# Allegro board wireless_receiver.brd
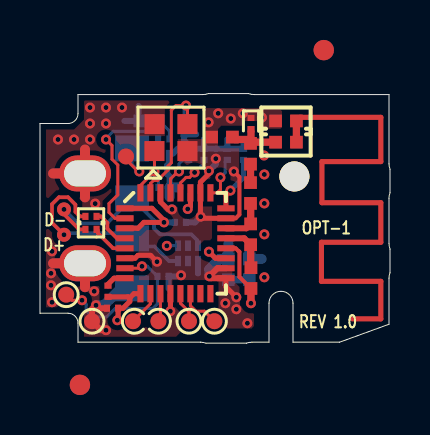
[diagram p0: board, top side]
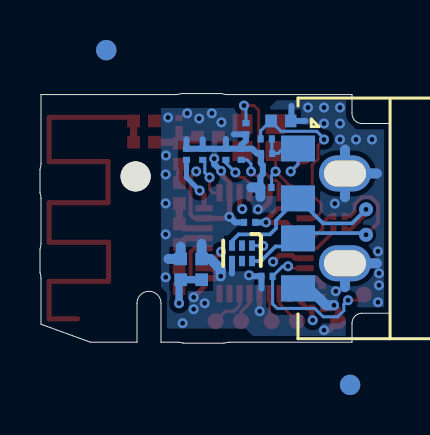
[diagram p1: board, bottom side, seen from below]

Outline 17.5 x 12.5 mm; copper layers: TOP, LAYER_2, LAYER_3, BOTTOM. Coordinates in mm from the lower left corner of the outline.
Outline path: 0,11 0,1.5 1.4,1.5 arc(1.75,1.35) 1.9,1 1.9,0.05 8.02,0.05 arc(8.16,0.04) 8.3,0 10.32,0 arc(10.46,0.04) 10.6,0.05 11.45,0.05 11.45,2 arc(12.05,2.6) 12.65,2 12.65,0.05 14.98,0.05 17.45,0.95 17.45,3.25 arc(17.46,3.39) 17.5,3.53 17.5,4.71 arc(17.46,4.85) 17.45,4.99 17.45,7.25 arc(17.46,7.39) 17.5,7.53 17.5,8.71 arc(17.46,8.85) 17.45,8.99 17.45,12.45 10.71,12.45 arc(10.57,12.46) 10.43,12.5 8.42,12.5 arc(8.28,12.46) 8.14,12.45 1.9,12.45 1.9,11.5 arc(1.75,11.15) 1.4,11 0,11

## Design rules (mm)
net group DIFFPAIR0: nets N226786 N226790
net group USB: nets N235738 N235745

## Placement (name value [footprint] x y rotation side)
C1  15pF  [0201]  7.2 10.74 90 bottom
C2  15pF  [0201]  6.2 7.8 180 bottom
C3  2.2nF  [0402]  9.42 3.7 90 bottom
C4  4.7pF  [0402]  10.47 3.7 90 bottom
C5  1.0pF  [0402]  10.53 9.49 90 top
C6  1.0pF  [0402]  9.1 10.32 180 top
C7  10nF  [0201]  3.63 1.75 180 top
C8  10nF  [0201]  7.02 6.05 0 bottom
C9  33nF  [0201]  7.44 9.46 90 bottom
C10  33nF  [0201]  8.2 9.46 90 bottom
C11  0.1uF  [0201]  10.18 9.46 90 bottom
C12  10uF  [0402#2]  5.45 11.13 180 bottom
C14  0.1uF  [0201]  6.17 9.5 0 bottom
C15  1.0pF  [0201]  10.55 11 90 top
C16  1.5pF  [0402]  12.3 10.07 0 top
J1  USB A  [CON-629004113921]  4.6 6.25 90 bottom
L1  5.6nH  [0402]  10.53 5.45 270 top
L2  6.8nH  [0402]  10.55 3.26 270 top
L3  6.8nH  [0402]  10.53 7.52 90 top
L4  3.9nH  [0402]  12.3 11.13 180 top
NOREF  -  [unnamed]  14.19 14.68 0 top
NOREF#2  -  [#2]  -96.66 11.13 0 top
NOREF#3  -  [#2]  -131.29 97.11 0 top
NOREF#4  -  [#2]  -79.87 74.31 0 top
NOREF#5  -  [unnamed#2]  12.72 8.35 0 top
NOREF#6  -  [unnamed]  2 -2.09 0 top
NOREF#7  -  [unnamed]  14.19 14.68 180 bottom
NOREF#8  -  [unnamed]  2 -2.09 180 bottom
R2  22K  [0201]  9.36 9.46 90 bottom
R5  10K  [0201]  3.4 2.6 270 top
R7  10K  [0201]  6.15 3.35 0 bottom
R8  10  [0201]  6.19 10.23 0 bottom
R9  22  [0201]  2.55 6.35 0 top
R10  22  [0201]  2.55 5.7 0 top
TP1  TP  [TP-1_0MM]  1.31 2.43 0 top
TP2  TP  [TP-1_0MM]  4.65 1.1 0 top
TP3  TP  [TP-1_0MM]  5.92 1.1 0 top
TP4  TP  [TP-1_0MM]  7.45 1.1 0 top
TP5  TP  [TP-1_0MM]  8.72 1.1 0 top
TP6  TP  [TP-1_0MM]  2.6 1.1 0 top
TP7  TP  [TP-1_0MM]  4.3 9.35 0 top
U1  nRF24LU1+  [QFN32]  6.77 5 270 top
U3  TPD2E001DRY  [SON6-TPD2E001DRY]  7.4 4.5 270 bottom
X1  16MHz  [XTAL-425F35B016M0000]  6.55 10.3 0 top

## Library data of the parts
C1-C12 C14-C16 = CAP NP
J1 = CON USB 4P 629004113921_2: Tolerance: TOL; User Part Number: PART#
L1-L4 = IND
R2 R5 R7-R10 = RES
TP1-TP7 = TP: User Part Number: *
U1 = IC NRF24LU1P: User Part Number: *
U3 = DIODE TVS TPD2E001DRY: User Part Number: *
X1 = xtal 425F35B016M0000: Tolerance: TOL; User Part Number: PART#

## Footprints (pads in the part's own frame, mm; a bottom-side part is the same pattern mirrored in y, then rotated)
0201
  rect 0.305x0.356 smd: 1(-0.279,0) 2(0.279,0)
0402
  rect 0.635x0.635 smd: 1(-0.521,0) 2(0.521,0)
0402#2
  rect 0.582x0.635 smd: 1(-0.521,0)
  rect 0.569x0.635 smd: 2(0.521,0)
CON-629004113921
  rect 1.3x1.7 smd: 1(3.5,0) 2(1.001,0) 3(-1.001,0) 4(-3.5,0)
  oval 1.8x2.6 hole 1.3x2.1: 5(-2.25,-2.35) 6(2.25,-2.35)
QFN32
  rect 0.305x0.864 smd: 1(-1.75,-2.525) 2(-1.25,-2.525) 3(-0.75,-2.525) 4(-0.25,-2.525) 5(0.25,-2.525) 6(0.75,-2.525) 7(1.25,-2.525) 8(1.75,-2.525) 17(1.75,2.525) 18(1.25,2.525) 19(0.75,2.525) 20(0.25,2.525) 21(-0.25,2.525) 22(-0.75,2.525) 23(-1.25,2.525) 24(-1.75,2.525)
  rect 0.864x0.305 smd: 9(2.525,-1.75) 10(2.525,-1.25) 11(2.525,-0.75) 12(2.525,-0.25) 13(2.525,0.25) 14(2.525,0.75) 15(2.525,1.25) 16(2.525,1.75) 25(-2.525,1.75) 26(-2.525,1.25) 27(-2.525,0.75) 28(-2.525,0.25) 29(-2.525,-0.25) 30(-2.525,-0.75) 31(-2.525,-1.25) 32(-2.525,-1.75)
SON6-TPD2E001DRY
  rect 0.52x0.3 smd: 1(-0.385,0.5) 2(-0.385,0) 3(-0.385,-0.5) 4(0.385,-0.5) 5(0.385,0) 6(0.385,0.5)
TP-1_0MM
  round 0.8 smd: 1(0,0)
unnamed
  round 1.02 smd: (0,0)
unnamed#2
  round 1.5 hole 1.5 unplated: (0,0)
XTAL-425F35B016M0000
  rect 1x1 smd: 1(-0.825,-0.675) 2(0.825,-0.675) 3(0.825,0.675) 4(-0.825,0.675)

## Nets
GND: C1.1 C2.1 C3.2 C4.2 C6.2 C7.2 C8.2 C9.2 C10.2 C11.2 C12.2 C14.2 C15.2 J1.4(GND) J1.5 J1.6 L4.2 R2.2 R7.2 TP6.1 U1.6(VSS#6) U1.12(VSS#12) U1.17(VSS#17) U1.18(VSS#18) U1.23(VSS#23) U1.26(VSS#26) U1.30(VSS#30) U3.4(GND) X1.2(GND1) X1.4(GND2)
VDD: C7.1 C8.1 C11.1 R5.2 U1.1(VDD#1) U1.3(VDD#3) U1.9(VDD#9) U1.19(VDD#19) U1.24(VDD#24) U1.27(VDD#27)
N223495: C16.2 L4.1
N225227: C5.2 C6.1 C15.1 C16.1
N225243: C5.1 L3.2
N225247: L1.1 L3.1 U1.22(ANT2)
N225251: L1.2 L2.1 U1.21(ANT1)
N225338: C3.1 C4.1 L2.2 U1.20(VDD_PA)
N226077: C10.1 U1.28(DEC1)
N226084: C9.1 U1.29(DEC2)
N226173: C1.2 U1.31(XC2) X1.3
N226183: C2.2 U1.32(XC1) X1.1(I)
N226786: R9.2 U1.4(D+)
N226790: R10.2 U1.5(D-)
N226831: C12.1 R8.2 U1.2(VBUS)
N226878: C14.1 J1.1(VBUS) R8.1 TP7.1 U3.1(VCC)
N227023: R5.1 U1.8(R\E\S\E\T\)
N227128: R7.1 TP1.1 U1.7(PROG)
N227143: TP2.1 U1.10(P0.0)
N227532: TP3.1 U1.11(P0.1)
N227547: TP4.1 U1.13(P0.2)
N227556: TP5.1 U1.14(P0.3)
N235738: J1.2(D-) R10.1 U3.3(IO1)
N235745: J1.3(D+) R9.1 U3.6(IO2)
N238943: R2.1 U1.25(IREF)

Pads without a net: U1 15 16; U3 2 5

## Via types
v1: diameter 0.5, hole 0.25, TOP to BOTTOM, 55 vias
v2: diameter 0.7, hole 0.25, TOP to BOTTOM, 2 vias

## Routing (per net, layer and track width the routed paths; a pad name or vN(x,y) marks a point on that pad's centre or on a via; arc(x,y) is an arc through that point)
GND: length 72
  TOP w0.2: v1(9.69,8.6) 9.97,8.32 9.97,6.44 9.78,6.25 U1.23
  TOP w0.25: U1.26 8.02,6.25 U1.23 ; v1(5.85,4.08) 5.53,4.4 4.9,4.4 4.75,4.25 U1.6
  TOP w0.254: v1(8.45,8.63) 8.45,8.49 8.02,8.06 U1.26 ; U1.30 6.02,7.08 6.4,6.7 v1(6.6,6.7) ; U1.17 9.3,2.82 v1(9.82,2.3) ; v1(6.52,1.6) 6.52,1.61 U1.12
  TOP w0.3: C7.2 2.95,1.75 v1(2.8,1.9) 2.6,1.7 TP6.1 3.05,0.65 v1(3.3,0.65) ; U1.18 8.87,3.75 v1(8.47,3.35) 8.56,3.25 U1.17
  TOP w0.5: J1.6 2.25,9.7 ; J1.6 0.65,8.5 ; J1.6 2.25,7.3 ; 2.25,2.8 J1.5 0.65,4
  LAYER_2 w0.5: 2.25,2.8 J1.5 ; J1.5 0.65,4 ; J1.5 2.25,5.2 ; J1.5 3.85,4 ; J1.6 2.25,9.7 ; J1.6 2.25,7.3 ; J1.6 3.85,8.5 ; J1.6 0.65,8.5
  LAYER_3 w0.5: J1.6 2.25,9.7 ; J1.6 0.65,8.5 ; J1.6 3.85,8.5 ; J1.6 2.25,7.3 ; J1.5 2.25,5.2 ; J1.5 2.25,2.8 ; J1.5 3.85,4 ; J1.5 0.65,4
  BOTTOM w0.3: v1(8.03,6.33) 7.75,6.05 C8.2 ; 7.81,10.46 C1.1 7.2,10.15 7.44,9.91 C9.2 ; R2.2 C11.2 10.18,10.22 ; R2.2 8.8,9.74 ; R2.2 9.36,10.22 ; 8.8,9.74 C10.2 ; 8.8,9.74 8.8,9.74 ; 7.9,3.5 U3.4 ; v1(8.45,8.63) 8.79,8.97 v1(8.79,9.24) ; C9.2 C10.2 ; C9.2 6.89,9.74 6.65,9.5 C14.2 6.45,9 6.36,8.91 6.36,8.47 6.48,8.35 C2.1 ; C10.2 8.2,10.23 ; 4.93,11.88 C12.2 4.22,11.13 ; v1(7.05,3.4) 7,3.35 R7.2 6.43,2.73
  BOTTOM w0.5: 6.48,7.33 C2.1 6.93,7.8 ; 2.25,7.3 J1.6 ; J1.6 0.65,8.5 ; J1.6 2.25,9.7 ; 9.42,4.98 C3.2 8.99,4.22 8.47,3.7 v1(8.47,3.35) ; J1.4 4.05,2.75 3.2,1.9 v1(2.8,1.9) ; 10.47,4.83 C4.2 11.08,4.22 ; 0.65,4 J1.5 2.25,2.8
  vias: v1(0.55,3.5) v1(0.55,2.9) v1(0.6,4.6) v1(0.6,2.05) v1(0.9,10.2) v1(1.7,10.2) v1(2.5,11.8) v1(2.5,11) v1(2.5,10.2) v1(2.76,6.99) v1(2.71,2.6) v1(3.3,11.8) v1(3.3,11) v1(4.1,11.8) v1(8.43,11.06) v1(8.91,11.51) v1(9.27,2) v1(9.54,11.25) v1(9.82,1.7) v1(10.14,11.51) v1(10.37,1) v1(11.1,11.3) v1(11.2,9.4) v1(11.22,8.45) v1(11.22,7) v1(11.22,5.45) v1(11.22,3.3)
VDD: length 12.9
  TOP w0.254: U1.1 5.6,6.75 6.25,6.1 v1(6.2,6.05) 5.2,6.05 4.9,5.75 U1.3 ; R5.2 4.4,2.32 4.47,2.25 ; 4.47,2.25 4.49,2.23 4.49,2.09 4.15,1.75 C7.1 3.91,1.19 v1(3.87,1.15) ; 4.47,2.25 4.7,2.48 U1.9 ; v1(9.52,7.64) 9.3,7.42 U1.24 ; U1.19 8.77,4.25 v1(8.45,4.58) ; U1.27 7.52,6.86 v1(7.39,6.72)
  BOTTOM w0.254: v1(9.52,7.64) 10.18,8.3 C11.1
  BOTTOM w0.3: C8.1 v1(6.2,6.05)
N223495: length 28.7
  TOP w0.254: L4.1 13,11.31 17.04,11.31 17.04,9.09 14.1,9.09 14.1,7.03 17.04,7.03 17.04,5.05 14.07,5.05 14.07,3.1 17.04,3.1 17.04,1.22 15.62,1.22
  TOP w0.363: C16.2 L4.1
N225227: length 3
  TOP w0.3: C15.1 10.55,10.59
  TOP w0.363: 10.55,10.59 10.55,10.08 10.54,10.07 ; C6.1 9.74,10.2 10.38,10.2 C5.2 10.54,10.07 ; 10.54,10.07 C16.1
N225243: length 0.9
  TOP w0.363: C5.1 L3.2
N225247: length 2.4
  TOP w0.3: L1.1 10.31,5.75 U1.22
  TOP w0.363: L3.1 10.53,6.99 L1.1
N225251: length 2.5
  TOP w0.3: L1.2 10.21,5.25 U1.21
  TOP w0.363: L2.1 10.53,3.79 L1.2
N225338: length 5.8
  TOP w0.2: L2.2 9.97,3.32 9.97,4.58 9.95,4.6 9.93,4.6 9.78,4.75 U1.20
  TOP w0.363: L2.2 v1(10.55,2)
  BOTTOM w0.363: C3.1 C4.1 10.55,3.1 v1(10.55,2)
N226077: length 2.2
  TOP w0.15: v1(7.73,8.55) 7.48,8.3 7.3,8.3 7.02,8.02 U1.28
  BOTTOM w0.15: v1(7.73,8.55) 8.2,9.02 C10.1
N226084: length 2.2
  TOP w0.15: v1(6.95,8.6) 6.9,8.6 6.52,8.22 U1.29
  BOTTOM w0.15: v1(6.95,8.6) 6.95,8.98 7.15,9.18 C9.1
N226173: length 7.4
  TOP w0.15: U1.31 5.52,7.99 5.68,8.15 5.88,8.15 6.4,8.68 6.4,8.87 6.57,9.04 6.57,11.67 6.8,11.9 v1(7.3,11.9) 7.37,11.83 X1.3
  BOTTOM w0.15: v1(7.3,11.9) 7.2,11.8 C1.2
N226183: length 3.3
  TOP w0.15: X1.1 v1(5.72,8.6) 5.02,7.9 U1.32
  BOTTOM w0.15: C2.2 5.92,8.4 v1(5.72,8.6)
N226786: length 2.1
  TOP w0.183: U1.4 4.23,5.24 3.86,5.24 3.37,5.73 3.37,6.02 3.04,6.35 R9.2
N226790: length 1.9
  TOP w0.183: U1.5 3.66,4.75 2.88,5.53 2.88,5.65 R10.2
N226831: length 9.2
  TOP w0.15: v1(3.3,10.2) 3.6,9.9 3.6,9.22 3.89,8.93 3.89,7.43 3.45,6.99 3.45,6.55 3.75,6.25 U1.2
  BOTTOM w0.15: v1(3.3,10.2) 3.3,10.25 3.66,10.61 5.45,10.61 C12.1 6.47,10.63 R8.2
N226878: length 9.4
  TOP w0.15: TP7.1 4.3,9.2 4.9,8.6 v1(4.97,8.6)
  LAYER_3 w0.3: v1(4.97,8.6) 5.37,8.2 5.37,5.85 v1(6.34,4.88)
  BOTTOM w0.15: v1(6.34,4.88) 6.35,4.89 U3.1 ; v1(4.97,8.6) 4.6,8.97 J1.1 5.35,9.75 5.6,9.5 C14.1 5.91,9.52 R8.1
N227023: length 1
  TOP w0.254: U1.8 3.7,3.25 3.4,2.95 R5.1
N227128: length 8.7
  TOP w0.15: v1(5.1,3.85) 5,3.75 U1.7 ; v1(2.1,2.15) 1.59,2.15 TP1.1
  BOTTOM w0.15: v1(5.1,3.85) 5.37,3.85 R7.1 5.87,1.97 5.64,1.74 3.76,1.74 3.34,1.32 2.62,1.32 2.31,1.63 2.31,1.94 v1(2.1,2.15)
N227143: length 1.7
  TOP w0.15: TP2.1 5.52,1.97 U1.10
N227532: length 1.4
  TOP w0.15: U1.11 6.02,1.2 TP3.1
N227547: length 1.6
  TOP w0.15: U1.13 7.02,2 7.45,1.57 TP4.1
N227556: length 2.1
  TOP w0.15: U1.14 7.52,1.88 7.8,1.6 8.22,1.6 TP5.1
N235738: length 10.5
  TOP w0.183: v2(1.2,6.7) 1.2,6.46 1.96,5.7 R10.1
  BOTTOM w0.183: v2(1.2,6.7) 1.9,6 3.35,6 J1.2 5.7,6.15 5.7,5.75 6,5.45 7.57,5.45 7.87,5.15 7.87,4.92 U3.3
N235745: length 10.5
  TOP w0.183: v2(1.2,5.43) 0.6,6.03 0.6,6.96 0.95,7.31 1.4,7.31 1.77,6.94 1.77,6.58 2,6.35 R9.1
  BOTTOM w0.183: v2(1.2,5.43) 1.28,5.51 4.34,5.51 J1.3 5.01,4.84 5.72,4.84 6.45,4.11 U3.6
N238943: length 2.2
  TOP w0.15: v1(9.02,8.3) 9.02,7.69 8.86,7.53 U1.25
  BOTTOM w0.15: R2.1 9.26,9.08 9.26,8.54 v1(9.02,8.3)

## Copper pours and planes (outline as drawn; the poured copper is in the pictures)
GND on TOP: 2.2,0.33 2.2,1.6 2,1.8 0.3,1.8 0.3,10.7 1.7,10.7 2.2,11.2 2.2,11.47 2.2,11.5 2.2,12.11 2.24,12.15 7.31,12.15 7.69,11.77 11.95,11.77 12.1,11.62 12.1,10.81 12.02,10.73 10.73,10.73 10.7,10.7 10.38,10.7 10.19,10.89 9.06,10.89 8.9,10.73 8.9,9.89 9.04,9.75 9.99,9.75 10.04,9.7 10.04,8.91 10.05,8.9 10.05,7.7 9.75,7.4 8.85,7.4 8.6,7.15 8.6,6.4 8.65,6.35 9.7,6.35 9.7,6.15 8.6,6.15 8.6,5.25 8.5,5.15 8.2,5.15 7.95,4.9 7.95,4.35 8.15,4.15 8.35,4.15 8.65,3.85 9.65,3.85 9.65,3.2 10,2.85 10,1.9 10.4,1.5 10.65,1.5 10.7,1.45 10.7,0.86 10.57,0.73 7.21,0.73 6.8,0.33 ; 1 cut-out
GND on BOTTOM: 2.21,0.36 2.21,1.28 1.69,1.8 0.3,1.8 0.3,10.71 1.7,10.71 1.98,10.99 2.14,11.22 2.2,11.5 2.2,12.16 5.67,12.16 6.06,11.77 11.45,11.77 11.45,2.8 11.16,2.51 11.16,0.73 7.22,0.73 6.85,0.36 ; 11 cut-outs
GND on LAYER_2: 8.34,0.27 8.2,0.31 8.05,0.32 2.17,0.32 2.17,1 1.94,1.54 1.4,1.77 0.27,1.77 0.27,10.73 1.4,10.73 1.94,10.96 2.17,11.5 2.17,12.18 8.14,12.18 8.3,12.19 8.46,12.23 10.39,12.23 10.54,12.19 10.7,12.18 11.4,12.18 11.4,2.58 11.24,2.31 11.18,2 11.18,0.32 10.6,0.32 10.44,0.31 10.28,0.27
GND on LAYER_3: 8.34,0.27 8.18,0.31 8.02,0.32 2.17,0.32 2.17,1 1.94,1.54 1.4,1.77 0.27,1.77 0.27,10.73 1.4,10.73 1.94,10.96 2.17,11.5 2.17,12.18 8.14,12.18 8.3,12.19 8.46,12.23 10.39,12.23 10.54,12.19 10.7,12.18 11.4,12.18 11.4,2.58 11.24,2.31 11.18,2 11.18,0.32 10.6,0.32 10.44,0.31 10.28,0.27
VDD on LAYER_3: 6.3,8.05 9.65,8.05 10,7.7 10,3.4 8.45,1.85 5.4,1.85 4.45,0.9 3.75,0.9 3.55,1.1 3.55,2.65 4.28,3.38 5.98,3.38 6.28,3.68 6.28,4.22 6.83,4.77 6.83,5.2 6.37,5.66 5.85,5.66 5.75,5.76 5.75,7.5

## Text on the board
User.Comments: SCORE LINE OR BREAKOT
Ref Des/Silkscreen Top: D+ | D- | REV 1.0 | OPT-1
User.10: A | 1
User.18: Referenced to: | Note: | Trace Width: | On Layers: | MICROSTRIP IMPEDANCE | 50 ohms +/- 10% | 0.3632 mm | 1,4 | 2,3 | 1/2 OZ ROUTING | (BEFORE PLATING) | 1 OZ ROUTING | SOLDER MASK | FR-4 (4.54 DK) | FR-4 (4.64 DK) | TOTAL THICKNESS AFTER PLATING TO BE 0.80 mm [31 mils] +/- 0.08 mm [3 mils] | AS MEASURED AT GOLD PLATED FINGERS (IF PRESENT ON BOARD) | FOR IMPEDANCE CONTROL, VENDORS CAN ADJUST | TRACE WIDTH TO A MAXIMUM OF +/-20% AND | PREPREG THICKNESS TO A MAXIMUM OF +/-0.025 mm [1 mils] | ANY FURTHER MODIFICATIONS MUST BE APPROVED BY VALVE CORPORATION | 0.2286 MM [9.00 MILS] | 0.1270 MM [5.00 MILS] | TOP | LAYER_2 | LAYER_3 | BOTTOM | Depth : 1/3 board thickness | 9. ENVIRONMENTAL: | 10. INNER LAYER PADS: | 11. ANTIPADS: | 12. PAD TOLERANCE: | 13. VIA ANNULAR RING: | 16. VIAS | 8. HOLES: | ALL MODIFICATIONS TO ARTWORK FEATURES MUST BE AUTHORIZED BY VALVE CORPORATION | 5. FINISH: | 6. SILKSCREEN: | 7. BOW AND TWIST: | 1. ACCEPTABILITY: | 2. MATERIAL: | 3. CLEANLINESS: | 4. SOLDER MASK: | NOTES              (FOR FABRICATION ISSUES EMAIL: | IMPEDANCE TESTING REQUIRED. | PLATED THROUGH HOLES MUST MEET THE REQUIREMENTS OF IPC-2221 | CLEAR SILKSCREEN | OVER THROUGH HOLE AND SMD PADS AND ANY FUNCTIONAL VIAS (TEST POINTS). | THE PCB SUPPLIER SHALL PROVIDE A SIGNED CERTIFICATE OF COMPLIANCE | BY AN AUTHORIZED QA REPRESENTATIVE. THE BASE MATERIAL OF PCB SHALL NOT | CONTAIN THE BANNED SUBSTANCES LISTED IN THE CERTIFICATE OF COMPLIANCE. | FINAL PRODUCT MUST BE RoHS COMPLIANT. | ALL UNUSED PADS ON THE INNER LAYERS SHOULD BE REMOVED. | ALL ANTIPADS DIAMETERS ON INNER LAYERS MUST NOT VARY MORE THAN +/-0.03MM | ALL OUTER LAYER PADS WITH A DIMENSION EQUAL OR LESS THAN 0.50 MM REQUIRE | +/-0.03 MM TOLERANCE. THE REST OF THE PADS SHOULD  FOLLOW THE IPC 6012 | IT IS ALLOWED TO BREAK PADS AT NON-NECK LOCATION FOR VIAS WITH DIAMMETERS | EQUAL OR LESS THAN 0.50 MM AS LONG AS A GUARANTEED ANNULAR RING | OF 0.03 MM IS PROVIDED AT NECK LOCATION. SEE IPC-A-600F/2.10 FOR CLASS 2. | IMMERSION GOLD. | NON-CONDUCTIVE EPOXY INK, WHITE COLOUR | SHALL NOT EXCEED 0.75% OF MAXIMUM DIMENSION WHEN TESTED | ACCORDING TO IPC-TM-650. | PRINTED WIRING BOARD SHALL MEET THE REQUIREMENTS OF | Isola 370HR High-Tg (Tg 170 Deg.C Minimum) FR-4 FIRE RETARDANT AND UL 94V-0 RATING | BOARD OPERATING TEMPERATURE MUST BE UL APPROVED TO A MAX 130 Deg C | MATERIAL SHOULD MEET IPC-4101/99 | MATERIAL SHALL ALSO MEET THE RELIABILITY REQUIREMENTS | FOR MULTIPLE THERMAL PROFILES USED IN LEAD FREE ASSEMBLIES | PRINTED WIRING BOARD CLEANLINESS SHALL MEET J-STD-001 | PRIOR TO APPLICATION OF SOLDER MASK. | SHALL MEET REQUIREMENTS OF IPC-SM-840 CLASS T,COLOUR GREEN. | IPC-6012 CLASS 2. | XXX | X.X | REV | DRAWN | DESIGN | CHECK | APPROVED | 19-DEC-2016 | DATE | REVISION DESCRIPTION | RELEASE STATE | DRN | FRAME | 4 LAYER CROSS SECTION BUILD | M1 | TREATMENT | MATERIAL | UNLESS OTHERWISE SPECIFIED: | .x=+/- .3 | DIMS ARE IN MM | .xx = +/- .10 | LEGEND | = CRITICAL DIMENSION | = TOOLING DIMENSION | TOLERANCES ARE | = PROCESS DIMENSION | = DIMENSION ID | = REVISION FLAG | ANGULAR +/- 1deg | THIRD ANGLE | PROJECTION | TO VALVE CORPORATION AND SHALL NOT BE USED BY, OR DISCLOSED IN WHOLE | OR IN PART TO ANYONE OUTSIDE OF VALVE CORPORATION WITHOUT THE PRIOR | THIS DOCUMENT AND THE INFORMATION CONTAINED HEREIN ARE PROPRIETARY | TITLE | SIMILAR | WRITTEN PERMISSION OF VALVE CORPORATION | TYPE | DWG NO | SHT | 1 | OF | D | C | B | A | NOTES: REMOVE BURRS AND SHARP EDGES 25 MAX | INTERPRET PER ASME Y14.5-2009 | 8 | 7 | 6 | 5 | 4 | 3 | 1.0 | RE-DRAWN WITH VALVE TITLEBLOCKS. | 2 | VAL-500-000019-R01 | WIRELESS RECEIVER
User.20: ANGLES | XXX | XX | 0.25 | 0.127 | DRAWN | RESP ENG | APPROVALS | DATE | 19-DEC-2016 | THIS DOCUMENT AND THE INFORMATION CONTAINED HEREIN ARE PROPRIETARY | TO VALVE CORPORATION AND SHALL NOT BE USED BY, OR DISCLOSED IN WHOLE | OR IN PART TO ANYONE OUTSIDE OF VALVE CORPORATION WITHOUT THE PRIOR | WRITTEN PERMISSION OF VALVE CORPORATION | UNLESS OTHERWISE | SPECIFIED, | DIMENSIONC ARE | IN MILLIMETERS | SCALE | TITLE | SIZE | 1:1 | DRAWING NO. | SHEET | 1 OF 1 | REV. | D | VAL-500-000019-R01 | WIRELESS RECEIVER | PCB | 01
User.21: LAYER 1 | L1 TOP | FILM 1 OF 11
User.22: LAYER 2 | L2 INNER | FILM 2 OF 11
User.23: LAYER 3 | L3 INNER | FILM 3 OF 11
User.32: LAYER 4 | L4 BOTTOM | FILM 4 OF 11
User.33: FAB DRAWING | FILM 7 OF 11
User.34: SOLDER PASTE TOP | FILM 5 OF 11
User.35: SOLDER PASTE BOTTOM | FILM 6 OF 11
User.36: SILKSCREEN TOP | FILM 8 OF 11
User.37: SILKSCREEN BOTTOM | FILM 9 OF 11
User.38: SOLDER MASK TOP | FILM 10 OF 11
User.39: SOLDER MASK BOTTOM | FILM 11 OF 11
User.40: ASSEMBLY TOP | SHEET 1 OF 2
User.41: ASSEMBLY BOTTOM | SHEET 2 OF 2
User.44: ASSEMBLY BOTTOM | SHEET 2 OF 2
User.45: FIGURE | SIZE | 2.10 x 1.30 | 0.25 | 1.50 | TOLERANCE | +/-0.10 | +0.000 -0.150 | +/-0.05 | DRILL CHART: TOP to BOTTOM | ALL UNITS ARE IN MILLIMETERS | PLATING | PLATED | NON-PLATED | TYPE | Slot | Drill | QTY | 2 | 57 | 1 | 58 | TOTAL HOLES:
